# Altium PCB CANLINK_revA.PcbDoc (part 2 of 2)
Units mm, origin at the board's own origin, x right, y up, seen from the top; angles counter-clockwise.
Board outline 58.5 x 50 mm, 4 copper layers (Top Layer, Mid Layer 1, Mid Layer 2, Bottom Layer), stack 1.586 mm thick; 130 components, 134 nets, 434 pads, 142 vias.
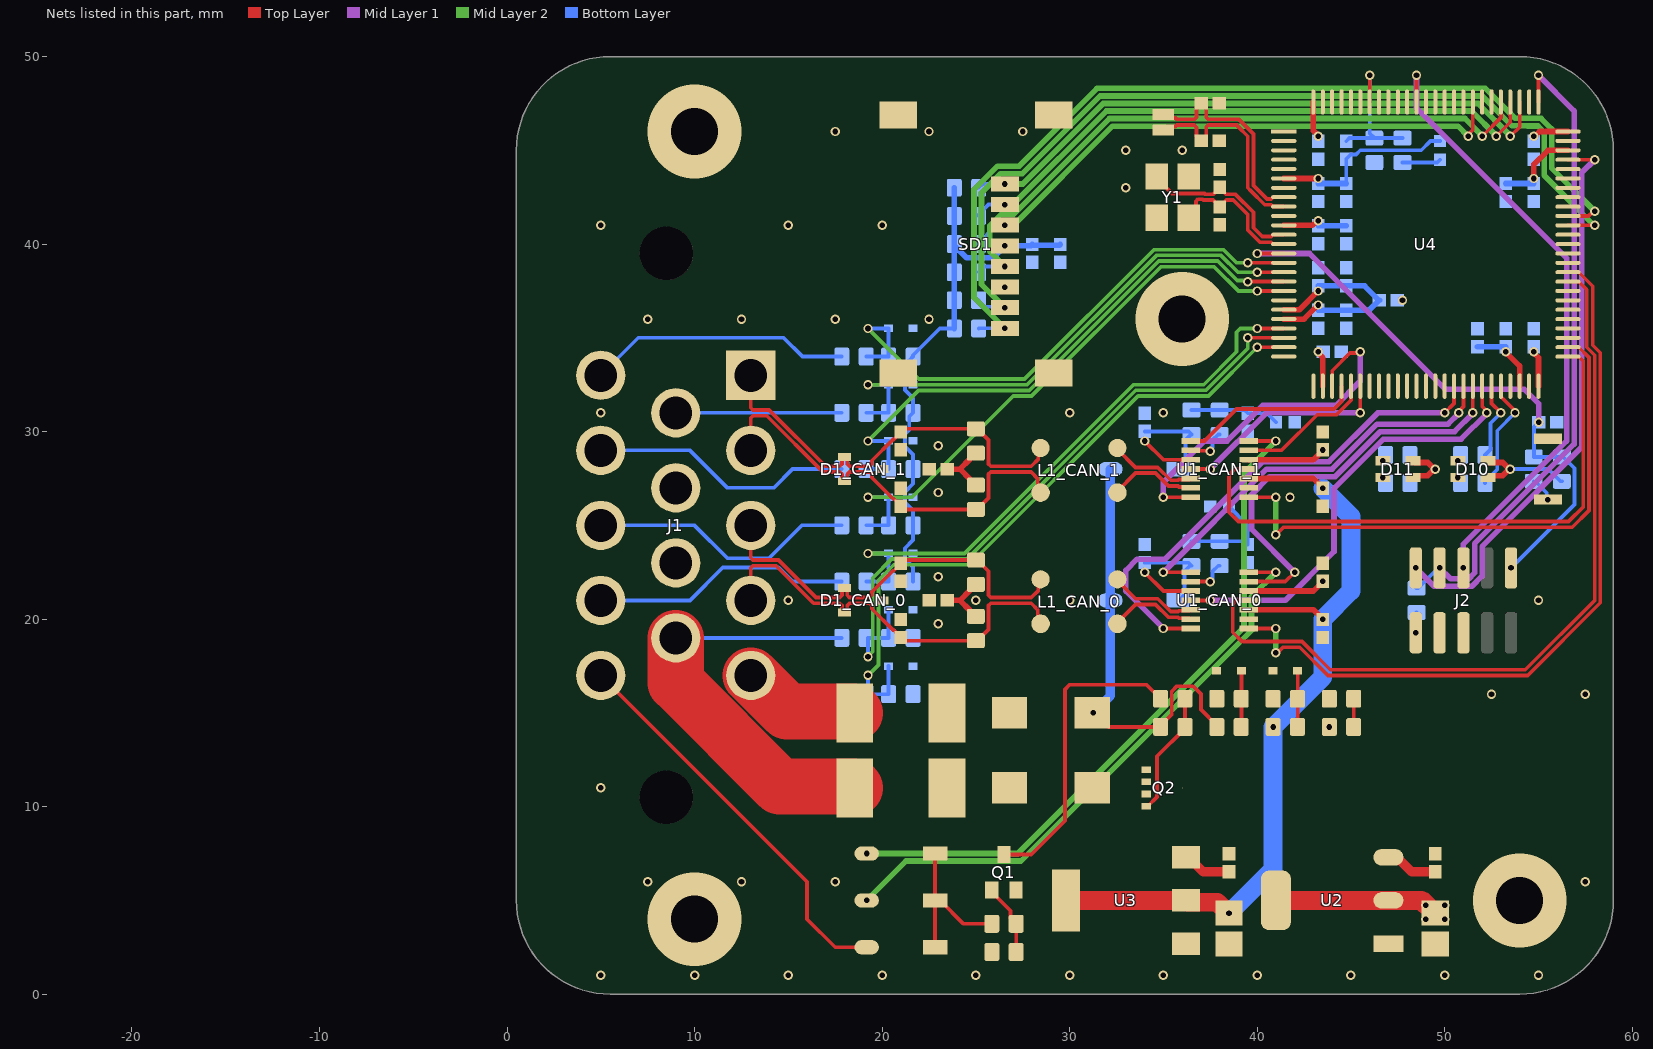
[diagram p4: the nets of this part, all layers, seen from the top]

## Via types
v1: diameter 0.5, hole 0.3, Top Layer to Bottom Layer, 138 vias
v2: diameter 5, hole 2.5, Top Layer to Bottom Layer, 4 vias

## Nets (pads, with @x,y where several pads share a name; then routed paths per layer and width w, separated by ;. In a path a pad name is that pad's centre, name@x,y a point inside that pad or via, vN(x,y) a via of type N, cw(c..) or ccw(c..) an arc to the next point about the centre after c; other vN are vias at no path point)
3V3: C2_CAN_0.1 C2_CAN_1.1 C8.2 C12.1 C13.1 C18.2 C20.1 C21.1 C22.1 C23.1 C24.1 C25.1 C32.1 C33.1 D10.2 D10.3 D11.2 D11.3 FB1.1 J2.1 R6.1 R8.1 R14.1 R20.1 R21.1 R22.1 R23.1 R24.1 R25.1 R26.2 R30.1 R39.1 R41.1 R42.1 R45.2 SD1.4 U1_CAN_0.5 U1_CAN_1.5 U2.2 U2.4 U4.6 U4.11 U4.27 U4.50 U4.75 U4.100 | length 78.8
  Top Layer w0.3: U1_CAN_0.5@39.543,21.5 43,21.5 43.5,22 v1(43.5,22.021) ; U1_CAN_1.5@39.543,28.5 43,28.5 43.5,29 v1(43.5,29.021) ; U4.11@41.425,41 42.946,41 43.196,41.25 v1(43.25,41.25) ; U4.6@41.425,43.5 v1(43.25,43.5) ; U4.100@43,47.575 43,46.046 43.25,45.796 v1(43.25,45.742) ; v1(43.25,34.25) 43.25,34.196 43.5,33.946 U4.27@43.5,32.425 ; D11.2@48.3,27.55 48.4,27.65 49.096,27.65 v1@49.446,28 ; D11.3@48.3,28.45 48.4,28.35 49.096,28.35 v1@49.446,28 ; v1(49.5,28) v1@49.446,28 ; D10.2@52.3,27.55 52.4,27.65 53.096,27.65 v1@53.446,28 ; D10.3@52.3,28.45 52.4,28.35 53.096,28.35 v1@53.446,28 ; v1(53.5,28) v1@53.446,28 ; v1(54.75,34.25) 54.75,34.196 55,33.946 U4.50@55,32.425 ; v1(54.75,45.748) 54.804,45.748 55.056,46 U4.75@56.575,46
  Top Layer w1: U2.4@41,5 48.75,5 v1(49,4.75) 49.025,4.75 49.275,4.5 49.325,4.5 C8.2@49.5,4.325 C8.2@48.885,4.94
  Bottom Layer w0.2: R42.1@21.65,22 21.65,22.785 21.218,23.217 21.218,23.784 21.65,24.215 R41.1@21.65,25 21.65,25.785 21.218,26.217 21.218,26.784 21.65,27.215 R39.1@21.65,28 21.65,28.785 21.218,29.217 21.218,29.855 21.45,30.087 21.45,30.8 R8.1@21.65,31 21.65,31.785 21.218,32.216 21.218,32.855 21.45,33.087 21.45,33.8 R6.1@21.65,34 21.65,34.075 23.075,35.5 R23.1@23.85,35.5 ; C32.1@44.75,43.229 44.75,44.543 44.986,44.779 45.279,44.779 45.5,45 48.75,45 49.242,45.492 49.742,45.492 R45.2@49.75,45.5 ; v1(48.46,19.27) 48.46,20.31 R26.2@48.5,20.35 ; v1(53.5,28) 55.525,28 56.175,27.35 R30.1@56.25,27.35
  Bottom Layer w0.3: R23.1@23.85,35.5 R22.1@23.85,37 R21.1@23.85,38.5 R20.1@23.85,39.925 ; R24.1@23.85,43 R25.1@23.85,41.5 R20.1@23.85,39.925 ; C13.1@28,39.942 29.463,39.942 C12.1@29.5,39.979 ; C13.1@28,39.979 27.926,39.905 v1(26.55,39.905) 25.918,39.273 24.502,39.273 R20.1@23.85,39.925 ; C21.1@43.25,40.979 C20.1@44.75,40.979 ; C33.1@43.25,43.229 C32.1@44.75,43.229
  other v1: 49,4 50,4 50,4.75 43.85,14.25 47.75,37
5V: C1_CAN_0.1 C1_CAN_1.1 C10.2 R16.1 U1_CAN_0.3 U1_CAN_1.3 U3.2 U3.4 | length 43.3
  Top Layer w0.3: U1_CAN_0.3@39.543,20.5 43,20.5 v1(43.5,20) ; U1_CAN_1.3@39.543,27.5 43,27.5 43.5,27 v1(43.5,26.979)
  Top Layer w1: U3.4@29.8,5 U3.2@36.2,5 36.3,4.9 37.875,4.9 38.45,4.325 v1(38.5,4.325)
  Bottom Layer w1: v1(38.5,4.325) 40.85,6.675 v1(40.85,14.25) 43.5,16.9 v1(43.5,20) 45,21.5 45,25.479 v1(43.5,26.979)
AUX_ON: D7.2 J1.14 | length 21.4
  Top Layer w0.2: J1.14@5,17 16,6 16,4 17.5,2.5 D7.2@19.175,2.5
BOOT: C18.1 R27.1 R29.2 U4.94 | length 7.9
  Top Layer w0.2: U4.94@46,47.575 v1(46,49)
  Bottom Layer w0.2: C18.1@44.75,45.479 44.921,45.65 R29.2@46.25,45.65 ; v1(46,49) 46,45.9 R29.2@46.25,45.65 ; R27.1@47.75,45.65 R29.2@46.25,45.65
CAN0_N: C4_CAN_0.1 D1_CAN_0.1 J1.3 L1_CAN_0.4 R3_CAN_0.1 | length 21.9
  Top Layer w0.2: J1.3@13,25 13,23.268 13.117,23.151 14.474,23.151 16.474,21.151 17.739,21.151 17.856,21.268 17.856,21.54 17.966,21.65 D1_CAN_0.1@18,21.65 ; D1_CAN_0.1@18.034,21.65 18.144,21.54 18.144,21.268 18.261,21.151 19.331,21.151 19.448,21.268 19.448,21.449 20.58,22.581 20.624,22.581 C4_CAN_0.1@21,22.957 ; C4_CAN_0.1@21,22.979 21.171,23.15 R3_CAN_0.1@25,23.15 25.075,23.15 25.677,22.548 25.677,21.268 25.794,21.151 27.951,21.151 28.332,21.532 28.332,22.007 L1_CAN_0.4@28.45,22.125
CAN0_P: C7_CAN_0.1 D1_CAN_0.2 J1.4 L1_CAN_0.1 R5_CAN_0.2 | length 22.1
  Top Layer w0.2: J1.4@13,21 13,22.732 13.117,22.849 14.349,22.849 16.349,20.849 17.739,20.849 17.856,20.732 17.856,20.46 17.966,20.35 D1_CAN_0.2@18,20.35 ; D1_CAN_0.2@18.034,20.35 18.144,20.46 18.144,20.732 18.261,20.849 19.331,20.849 19.448,20.732 19.448,20.551 20.58,19.419 20.624,19.419 21.193,18.85 R5_CAN_0.2@25,18.85 25.075,18.85 25.677,19.452 25.677,20.732 25.794,20.849 27.951,20.849 28.294,20.506 28.294,20.262 28.299,20.257 28.299,19.901 L1_CAN_0.1@28.45,19.75
CAN1_N: C4_CAN_1.1 D1_CAN_1.1 J1.1 L1_CAN_1.4 R3_CAN_1.1 | length 22.4
  Top Layer w0.2: J1.1@13,33 13,31.268 13.117,31.151 13.974,31.151 16.974,28.151 17.739,28.151 17.856,28.268 17.856,28.54 17.966,28.65 D1_CAN_1.1@18,28.65 ; D1_CAN_1.1@18.034,28.65 18.144,28.54 18.144,28.268 18.261,28.151 19.331,28.151 19.448,28.268 19.448,28.449 20.58,29.581 20.624,29.581 C4_CAN_1.1@21,29.957 ; C4_CAN_1.1@21,29.979 21.171,30.15 R3_CAN_1.1@25,30.15 25.075,30.15 25.677,29.548 25.677,28.268 25.794,28.151 27.951,28.151 28.332,28.532 28.332,29.007 L1_CAN_1.4@28.45,29.125
CAN1_P: C7_CAN_1.1 D1_CAN_1.2 J1.2 L1_CAN_1.1 R5_CAN_1.2 | length 22.5
  Top Layer w0.2: J1.2@13,29 13,30.732 13.117,30.849 13.849,30.849 16.849,27.849 17.739,27.849 17.856,27.732 17.856,27.46 17.966,27.35 D1_CAN_1.2@18,27.35 ; D1_CAN_1.2@18.034,27.35 18.144,27.46 18.144,27.732 18.261,27.849 19.331,27.849 19.448,27.732 19.448,27.551 20.58,26.419 20.624,26.419 21.193,25.85 R5_CAN_1.2@25,25.85 25.075,25.85 25.677,26.452 25.677,27.732 25.794,27.849 27.951,27.849 28.294,27.506 28.294,27.262 28.299,27.257 28.299,26.901 L1_CAN_1.1@28.45,26.75
CAN_PWR: D2_CAN_0.2 D2_CAN_1.2 D3.1 D4.1 Q2.1 Q2.2 Q2.3 R13.2 R18.1 | length 23.3
  Top Layer w0.2: D3.1@31.311,15 32.061,14.25 R13.2@34.85,14.25 34.85,14.325 35.452,14.927 35.452,16.153 35.725,16.427 36.575,16.427 37,16.002 37,15.175 37.85,14.325 R18.1@37.85,14.25
  Bottom Layer w0.5: v1(31.261,15) 32.175,15.914 D2_CAN_0.2@32.175,21 D2_CAN_1.2@32.175,28
EXT_IN_A: J1.10 R7.2 | length 14.1
  Bottom Layer w0.2: J1.10@5,33 7,35 14.75,35 15.75,34 R7.2@17.85,34
EXT_IN_B: J1.6 R9.2 | length 8.9
  Bottom Layer w0.2: J1.6@9,31 R9.2@17.85,31
EXT_IN_C: J1.11 R40.2 | length 14.1
  Bottom Layer w0.2: J1.11@5,29 9.75,29 11.75,27 14.218,27 15.218,28 R40.2@17.85,28
EXT_IN_D: J1.12 R43.2 | length 14.3
  Bottom Layer w0.2: J1.12@5,25 10,25 11.75,23.25 13.968,23.25 15.718,25 R43.2@17.85,25
EXT_IN_E: J1.13 R44.2 | length 13.9
  Bottom Layer w0.2: J1.13@5,21 9.75,21 11.5,22.75 14.468,22.75 15.218,22 R44.2@17.85,22
G_LED: R31.1 U4.46 | length 6.1
  Top Layer w0.2: U4.46@53,32.425 53,31.853 53.693,31.161 53.693,31.057 v1(53.75,31)
  Bottom Layer w0.2: R31.1@52.15,27.25 52.15,27.325 52.8,27.975 52.8,30.05 v1(53.75,31)
GND: C1_CAN_0.2 C1_CAN_1.2 C2_CAN_0.2 C2_CAN_1.2 C3_CAN_0.2 C3_CAN_1.2 C4_CAN_0.2 C4_CAN_1.2 C5_CAN_0.2 C5_CAN_1.2 C6_CAN_0.2 C6_CAN_1.2 C7_CAN_0.2 C7_CAN_1.2 C8.1 C9.2 C10.1 C11.2 C12.2 C13.2 C14.2 C15.2 C16.2 C17.2 C19.2 C20.2 C21.2 C22.2 C23.2 C24.2 C25.2 C26.2 C27.2 C28.2 C29.2 C30.2 C31.2 C32.2 C33.2 C34.2 C35.2 D1_CAN_0.3 D1_CAN_1.3 D5.2 D6.2 D12.2 D13.2 D14.2 D15.2 D16.2 D17.2 D18.2 J1.7 J1.8 J2.3 J2.5 Q1.2 R4_CAN_0.1 R4_CAN_1.1 R11.2 R15.2 R17.2 R19.2 R29.1 R33.1 R36.2 R38.2 SD1.6 SD1.9 SD1.10 SD1.11 SD1.12 SW2.2 U1_CAN_0.2 U1_CAN_1.2 U2.1 U3.1 U4.10 U4.19 U4.26 U4.49 U4.74 U4.99 Y1.2 Y1.4
  other v1: 5,1 10,1 15,1 20,1 25,1 30,1 35,1 40,1 45,1 50,1 55,1 7.5,6 12.5,6 17.5,6 57.5,6 5,11 52.5,16 57.5,16 23,19.75 15,21 25,21 30,21 55,21 23,22.25 41.75,26.5 23,26.75 23,29.25 5,31 30,31 35,31 7.5,36 12.5,36 17.5,36 22.5,36 26.55,37.705 5,41 15,41 20,41 33,43 33,45 36,45 17.5,46 22.5,46 27.5,46
  other v2: 10,4 54,5 36,36 10,46
NetC3_CAN_0_1: C3_CAN_0.1 D2_CAN_0.1 R1_CAN_0.1 U1_CAN_0.10 | length 7.6
  Top Layer w0.2: v1(34,22.5) 35,21.5 U1_CAN_0.10@36.457,21.5
  Bottom Layer w0.2: C3_CAN_0.1@34,23.021 34.021,23 36.35,23 R1_CAN_0.1@36.5,22.85 36.425,22.85 36.125,22.55 36.125,21.281 35.844,21 D2_CAN_0.1@35.825,21
NetC3_CAN_1_1: C3_CAN_1.1 D2_CAN_1.1 R1_CAN_1.1 U1_CAN_1.10 | length 7.4
  Top Layer w0.2: v1(34,29.5) 35,28.5 U1_CAN_1.10@36.457,28.5
  Bottom Layer w0.2: C3_CAN_1.1@34,30.021 34.021,30 36.35,30 R1_CAN_1.1@36.5,29.85 36.475,29.85 36.175,29.55 D2_CAN_1.1@36.175,28.077
NetC5_CAN_0_1: C5_CAN_0.1 R1_CAN_0.2 R2_CAN_0.2 R4_CAN_0.2 | length 5.5
  Bottom Layer w0.2: R1_CAN_0.2@36.5,24.15 R2_CAN_0.2@38,24.15 39.329,24.15 C5_CAN_0.1@39.5,23.979 ; R4_CAN_0.2@38.5,26 39.5,25 C5_CAN_0.1@39.5,23.979 ; C5_CAN_0.1@39.5,24 C5_CAN_0.1@39.5,23.979
NetC5_CAN_1_1: C5_CAN_1.1 R1_CAN_1.2 R2_CAN_1.2 R4_CAN_1.2 | length 4.8
  Bottom Layer w0.2: R1_CAN_1.2@36.5,31.15 R2_CAN_1.2@38,31.15 39.329,31.15 C5_CAN_1.1@39.5,30.979 40.521,30.979 R4_CAN_1.2@41,30.5
NetC6_CAN_0_1: C6_CAN_0.1 R3_CAN_0.2 R5_CAN_0.1 | length 3.2
  Top Layer w0.3: C6_CAN_0.1@23.479,21 24.15,21 ; R5_CAN_0.1@25,20.15 24.925,20.15 24.675,20.4 24.675,20.475 24.15,21 ; R3_CAN_0.2@25,21.85 24.925,21.85 24.675,21.6 24.675,21.525 24.15,21
NetC6_CAN_1_1: C6_CAN_1.1 R3_CAN_1.2 R5_CAN_1.1 | length 3.2
  Top Layer w0.3: C6_CAN_1.1@23.479,28 24.15,28 ; R5_CAN_1.1@25,27.15 24.925,27.15 24.675,27.4 24.675,27.475 24.15,28 ; R3_CAN_1.2@25,28.85 24.925,28.85 24.675,28.6 24.675,28.525 24.15,28
NetC9_1: C9.1 C11.1 Q2.5-6-7-8 U2.3 U3.3 | length 5.4
  Top Layer w0.5: U3.3@36.2,7.3 36.35,7.3 37.129,6.521 C11.1@38.5,6.521 ; U2.3@47,7.3 47.465,7.3 48.244,6.521 C9.1@49.5,6.521
NetC28_1: C28.1 C29.1 U4.48 | length 3.6
  Top Layer w0.3: v1(53.25,34.25) 54,33.5 U4.48@54,32.425
  Bottom Layer w0.3: C28.1@51.75,34.521 C29.1@53.25,34.521
NetC30_1: C30.1 C31.1 U4.73 | length 4.4
  Top Layer w0.3: v1(54.75,43.5) 54.75,44.25 55.5,45 U4.73@56.575,45
  Bottom Layer w0.3: C30.1@53.25,43.229 C31.1@54.75,43.229
NetD3_2: D3.2 F1.2
NetD4_2: D4.2 F2.2
NetD5_1: D5.1 R6.2 R7.1 U4.15 | length 30.2
  Top Layer w0.2: v1(39.5,39) U4.15@41.425,39
  Mid Layer 2 w0.2: v1(19.25,35.5) 21.95,32.8 27.6,32.8 34.5,39.7 38.2,39.7 38.9,39 v1(39.5,39)
  Bottom Layer w0.2: R7.1@19.15,34 R6.2@20.35,34 20.34,34.01 D5.1@20.34,35.5 v1(19.25,35.5)
NetD6_1: D6.1 R8.2 R9.1 U4.16 | length 29.2
  Top Layer w0.2: v1(40,38.5) U4.16@41.425,38.5
  Mid Layer 2 w0.2: v1(19.25,32.5) 19.252,32.498 27.725,32.498 34.625,39.398 38.075,39.398 38.973,38.5 v1(40,38.5)
  Bottom Layer w0.2: R9.1@19.15,31 R8.2@20.35,31 20.34,31.01 D6.1@20.34,32.5 v1(19.25,32.5)
NetD7_1: D7.1 D8.1 D9.1 R10.2 | length 8.5
  Top Layer w0.2: D7.1@22.825,2.5 D8.1@22.825,5 ; D9.1@22.825,7.5 D8.1@22.825,5 ; R10.2@25.85,3.75 24.348,3.75 23.098,5 D8.1@22.825,5
NetD10_1: D10.1 R31.2
  other v1: 50.7,27.55
NetD10_4: D10.4 R32.2
  other v1: 50.7,28.45
NetD11_1: D11.1 R33.2
  other v1: 46.7,27.55
NetD11_4: D11.4 R34.2
  other v1: 46.7,28.45
NetD12_1: D12.1 R35.2 R36.1 U4.24 | length 36.1
  Top Layer w0.2: v1(40,34.5) U4.24@41.425,34.5
  Mid Layer 2 w0.2: v1(19.25,17) 19.802,17.552 19.802,22.075 20.625,22.898 24.651,22.898 33.653,31.9 37.4,31.9 v1(40,34.5)
  Bottom Layer w0.2: R35.2@19.15,16 R35.2@19.25,16 ; v1(19.25,17) R35.2@19.25,16 ; R35.2@19.5,15.75 R35.2@19.25,16 ; D12.1@20.34,17.5 20.34,16.01 R36.1@20.35,16 R35.2@19.25,16
NetD13_1: D13.1 R37.2 R38.1 U4.23 | length 35.5
  Top Layer w0.2: v1(39.5,35) U4.23@41.425,35
  Mid Layer 2 w0.2: v1(19.25,18) 19.25,18.017 19.5,18.267 19.5,22.2 20.5,23.2 24.527,23.2 33.528,32.202 37.275,32.202 39.5,34.427 v1(39.5,35)
  Bottom Layer w0.2: v1(19.25,18) 19.25,19 R38.1@20.35,19 20.34,19.01 D13.1@20.34,20.5
NetD14_1: D14.1 R16.2 R17.1 | length 3
  Top Layer w0.2: R16.2@42.15,14.25 42.16,14.26 D14.1@42.16,17.25
NetD15_1: D15.1 R18.2 R19.1 | length 3
  Top Layer w0.2: R18.2@39.15,14.25 39.16,14.26 D15.1@39.16,17.25
NetD16_1: D16.1 R39.2 R40.1 U4.17 | length 30.4
  Top Layer w0.2: v1(39.5,38) U4.17@41.425,38
  Mid Layer 2 w0.2: v1(19.25,29.5) 21.947,32.197 27.85,32.197 34.75,39.097 37.903,39.097 38.943,38.057 39.443,38.057 v1(39.5,38)
  Bottom Layer w0.2: R40.1@19.15,28 R39.2@20.35,28 20.34,28.01 D16.1@20.34,29.5 v1(19.25,29.5)
NetD17_1: D17.1 R41.2 R43.1 U4.18 | length 31.3
  Top Layer w0.2: 40.25,37.5 U4.18@41.425,37.5
  Mid Layer 2 w0.2: v1(19.25,26.5) 21.6,26.5 26.995,31.895 27.975,31.895 34.875,38.795 37.705,38.795 39,37.5 v1(40,37.5)
  Bottom Layer w0.2: R43.1@19.15,25 R41.2@20.35,25 20.34,25.01 D17.1@20.34,26.5 v1(19.25,26.5)
NetD18_1: D18.1 R42.2 R44.1 U4.22 | length 31.6
  Top Layer w0.2: v1(40,35.5) U4.22@41.425,35.5
  Mid Layer 2 w0.2: v1(19.25,23.5) 19.252,23.502 24.402,23.502 33.403,32.503 37.15,32.503 38.9,34.253 38.9,35.3 39.1,35.5 v1(40,35.5)
  Bottom Layer w0.2: R44.1@19.15,22 R42.2@20.35,22 20.34,22.01 D18.1@20.34,23.5 v1(19.25,23.5)
NetQ1_1: Q1.1 R10.1 R11.1 | length 3.8
  Top Layer w0.2: Q1.1@25.85,5.55 25.85,5.45 26.85,4.45 26.85,4.05 R10.1@27.15,3.75 R11.1@27.15,2.25
NetQ1_3: Q1.3 R12.2 | length 16.6
  Top Layer w0.2: Q1.3@26.5,7.45 27.95,7.45 29.75,9.25 29.75,16.25 30,16.5 34.1,16.5 34.475,16.125 34.55,16.125 34.85,15.825 R12.2@34.85,15.75
NetQ2_4: Q2.4 R12.1 R13.1 | length 6.6
  Top Layer w0.2: Q2.4@34.09,10.025 34.165,10.025 34.658,10.518 34.658,12.683 36.15,14.175 R13.1@36.15,14.25 R12.1@36.15,15.75
NetR2_CAN_0_1: R2_CAN_0.1 U1_CAN_0.9 | length 2.1
  Top Layer w0.2: U1_CAN_0.9@36.457,22 v1(37.5,22)
  Bottom Layer w0.2: v1(37.5,22) 37.625,22.125 37.625,22.55 37.925,22.85 R2_CAN_0.1@38,22.85
NetR2_CAN_1_1: R2_CAN_1.1 U1_CAN_1.9 | length 2.2
  Top Layer w0.2: U1_CAN_1.9@36.457,29 36.482,28.975 37.475,28.975 v1(37.5,28.95)
  Bottom Layer w0.2: v1(37.5,28.95) 37.5,29.031 37.625,29.156 37.625,29.55 37.925,29.85 R2_CAN_1.1@38,29.85
NetR14_2: R14.2 R15.1 | length 1.5
  Top Layer w0.2: R14.2@45.15,14.25 R15.1@45.15,15.75
NetR27_2: R27.2 R45.1 | length 2.1
  Bottom Layer w0.2: R27.2@47.75,44.35 49.6,44.35 R45.1@49.75,44.5
NetR28_2: R28.2 SW2.1 | length 1.3
  Bottom Layer w0.2: R28.2@54.75,27.35 54.825,27.35 55.443,26.732 55.443,26.432 v1(55.5,26.375)
NetU1_CAN_0_1: U1_CAN_0.1 U4.60 | length 41.1
  Top Layer w0.2: U1_CAN_0.1@39.543,19.5 v1(41,19.5) ; v1(40.996,18.204) 41.078,18.204 41.374,18.5 42.273,18.5 43.775,16.998 54.425,16.998 58.3,20.873 58.3,34.2 57.9,34.6 57.9,37.747 57.147,38.5 U4.60@56.575,38.5
  Mid Layer 2 w0.3: v1(40.996,18.204) 40.998,18.205 v1(41,19.5) v1(41,19.5)
NetU1_CAN_0_4: U1_CAN_0.4 U4.59 | length 42
  Top Layer w0.2: U1_CAN_0.4@39.543,21 39.532,20.989 38.889,20.989 38.7,20.8 38.7,19.3 39.198,18.802 42.398,18.802 43.9,17.3 54.3,17.3 57.998,20.998 57.998,34.075 57.576,34.497 57.576,37.571 57.151,37.996 56.58,37.996 U4.59@56.575,38
NetU1_CAN_0_6: U1_CAN_0.6 U4.43 | length 22.8
  Top Layer w0.2: U1_CAN_0.6@39.543,22 41.5,22 v1(42,22.5) ; v1(51.5,31) U4.43@51.5,32.425
  Mid Layer 1 w0.3: v1(42,22.5) 39.7,24.8 39.7,26.632 40.666,27.598 44.166,27.598 46.566,29.998 49.998,29.998 50,30 50.528,30 51.5,30.972 v1(51.5,31)
NetU1_CAN_0_8: U1_CAN_0.8 U4.42 | length 22.3
  Top Layer w0.2: v1(35,22.5) U1_CAN_0.8@36.457,22.5 ; v1(50.75,31) 50.75,31.081 51,31.331 U4.42@51,32.425
  Mid Layer 1 w0.3: v1(35,22.5) 40.5,28 44,28 46.4,30.4 49.832,30.4 49.834,30.402 50.179,30.402 50.75,30.972 v1(50.75,31)
NetU1_CAN_0_11: U1_CAN_0.11 U4.44 | length 23.5
  Top Layer w0.2: U1_CAN_0.11@36.457,21 v1(37.5,21) ; U4.44@52,32.425 52,31.331 52.25,31.081 v1(52.25,31)
  Mid Layer 1 w0.3: v1(37.5,21) 41.5,21 44.1,23.6 44.1,26.964 46.733,29.597 50.875,29.597 52.25,30.972 v1(52.25,31)
NetU1_CAN_0_14: U1_CAN_0.14 U4.41 | length 27.5
  Top Layer w0.2: v1(35,19.5) U1_CAN_0.14@36.457,19.5 ; v1(50,31) 50.5,31.5 U4.41@50.5,32.425
  Mid Layer 1 w0.3: v1(35,19.5) 33,21.5 33,22.6 33.6,23.2 35.1,23.2 40.302,28.402 43.834,28.402 46.432,31 v1(50,31)
NetU1_CAN_1_1: U1_CAN_1.1 U4.52 | length 30.2
  Top Layer w0.2: U1_CAN_1.1@39.543,26.5 v1(41,26.5) ; v1(41,24.5) 41.398,24.898 56.198,24.898 56.2,24.9 56.8,24.9 57.697,25.797 57.697,33.95 57.147,34.5 U4.52@56.575,34.5
  Mid Layer 2 w0.3: v1(41,24.5) v1(41,26.5)
NetU1_CAN_1_4: U1_CAN_1.4 U4.51 | length 31.3
  Top Layer w0.2: U1_CAN_1.4@39.543,28 38.8,28 38.5,27.7 38.5,25.7 39,25.2 56.073,25.2 56.075,25.202 56.602,25.202 57.395,25.995 57.395,33.752 57.151,33.996 56.58,33.996 U4.51@56.575,34
NetU1_CAN_1_6: U1_CAN_1.6 U4.30 | length 7.3
  Top Layer w0.2: U1_CAN_1.6@39.543,29 41.3,29 43.2,30.9 44.227,30.9 44.802,31.475 45,31.673 U4.30@45,32.425
NetU1_CAN_1_8: U1_CAN_1.8 U4.29 | length 9.7
  Top Layer w0.2: U1_CAN_1.8@36.457,29.5 37.2,29.5 38.902,31.202 44.102,31.202 44.5,31.6 U4.29@44.5,32.425
NetU1_CAN_1_11: U1_CAN_1.11 U4.31 | length 11.7
  Top Layer w0.2: U1_CAN_1.11@36.457,28 v1(37.5,28) ; v1(45.5,31) U4.31@45.5,32.425
  Mid Layer 1 w0.3: v1(37.5,28) 40.498,30.998 45.498,30.998 v1(45.5,31)
NetU1_CAN_1_14: U1_CAN_1.14 U4.28 | length 19.3
  Top Layer w0.2: v1(35,26.5) U1_CAN_1.14@36.457,26.5 ; U4.28@44,32.425 44,33.25 44.943,34.193 45.443,34.193 v1(45.5,34.25)
  Mid Layer 1 w0.3: v1(35,26.5) 35,27.3 37.2,29.5 38.4,29.5 40.3,31.4 44.2,31.4 45.5,32.7 v1(45.5,34.25)
NetU4_1: U4.1
NetU4_2: U4.2
NetU4_3: U4.3
NetU4_4: U4.4
NetU4_5: U4.5
NetU4_7: U4.7
NetU4_25: U4.25
NetU4_32: U4.32
NetU4_33: U4.33
NetU4_34: U4.34
NetU4_35: U4.35
NetU4_36: U4.36
NetU4_37: U4.37
NetU4_38: U4.38
NetU4_39: U4.39
NetU4_40: U4.40
NetU4_47: U4.47
NetU4_53: U4.53
NetU4_54: U4.54
NetU4_55: U4.55
NetU4_56: U4.56
NetU4_57: U4.57
NetU4_58: U4.58
NetU4_61: U4.61
NetU4_62: U4.62
NetU4_63: U4.63
NetU4_64: U4.64
NetU4_67: U4.67
NetU4_68: U4.68
NetU4_69: U4.69
NetU4_70: U4.70
NetU4_71: U4.71
NetU4_77: U4.77
NetU4_81: U4.81
NetU4_82: U4.82
NetU4_84: U4.84
NetU4_85: U4.85
NetU4_86: U4.86
NetU4_87: U4.87
NetU4_88: U4.88
NetU4_90: U4.90
NetU4_91: U4.91
NetU4_92: U4.92
NetU4_93: U4.93
NetU4_95: U4.95
NetU4_96: U4.96
NetU4_97: U4.97
NetU4_98: U4.98
nPWR_FLT_LED: R34.1
PRE_CAN_CAN_0_N: L1_CAN_0.3 U1_CAN_0.12 | length 4.7
  Top Layer w0.2: L1_CAN_0.3@32.55,22.125 32.55,22.055 33.517,21.088 33.925,21.088 34.705,21.088 35.392,20.401 35.792,20.401 35.839,20.447 36.405,20.447 U1_CAN_0.12@36.457,20.5
PRE_CAN_CAN_0_P: L1_CAN_0.2 U1_CAN_0.13 | length 4.7
  Top Layer w0.2: L1_CAN_0.2@32.55,19.75 32.55,19.82 33.517,20.787 33.8,20.787 34.58,20.787 35.267,20.099 35.792,20.099 35.839,20.052 36.405,20.052 U1_CAN_0.13@36.457,20
PRE_CAN_CAN_1_N: L1_CAN_1.3 U1_CAN_1.12 | length 4.7
  Top Layer w0.2: L1_CAN_1.3@32.55,29.125 32.55,29.055 33.517,28.088 33.925,28.088 34.705,28.088 35.392,27.401 35.792,27.401 35.839,27.447 36.405,27.447 U1_CAN_1.12@36.457,27.5
PRE_CAN_CAN_1_P: L1_CAN_1.2 U1_CAN_1.13 | length 4.7
  Top Layer w0.2: L1_CAN_1.2@32.55,26.75 32.55,26.82 33.517,27.787 33.8,27.787 34.58,27.787 35.267,27.099 35.792,27.099 35.839,27.052 36.405,27.052 U1_CAN_1.13@36.457,27
PWR_A: F1.1 J1.5 R35.1 | length 11.6
  Top Layer w3: J1.5@13,17 14.925,15.075 18.47,15.075 F1.1@18.545,15
  Bottom Layer w0.2: J1.5@13,17 13.28,17 14.28,16 R35.1@17.85,16
PWR_B: F2.1 J1.9 R37.1 | length 23.1
  Top Layer w3: J1.9@9,19 9,16.614 14.539,11.075 18.47,11.075 F2.1@18.545,11
  Bottom Layer w0.2: J1.9@9,19 R37.1@17.85,19
R_LED: R32.1 U4.45 | length 4.2
  Top Layer w0.2: U4.45@52.5,32.425 52.5,31.5 v1(53,31)
  Bottom Layer w0.2: R32.1@52.15,28.75 52.443,29.043 52.443,30.443 v1(53,31)
RESETN: C19.1 J2.10 R28.1 R30.2 U4.14 | length 31.9
  Top Layer w0.2: v1(40,39.5) U4.14@41.425,39.5
  Mid Layer 1 w0.3: v1(40,39.5) 42.8,39.5 50.05,32.25 54.25,32.25 55.021,31.479 v1(55.021,30.5)
  Bottom Layer w0.2: v1(53.54,22.73) 56.927,26.117 56.927,28.048 56.325,28.65 R30.2@56.25,28.65 R28.1@54.75,28.65 54.764,28.664 54.764,30.264 55,30.5 v1(55.021,30.5)
SD_CLK: R21.2 SD1.5 U4.80 | length 35.3
  Top Layer w0.2: v1(52,45.75) 53,46.75 U4.80@53,47.575
  Mid Layer 2 w0.3: v1(26.55,38.805) 25.75,39.605 25.75,40.983 26.322,41.555 26.987,41.555 32.126,46.694 51.084,46.694 52,45.778 v1(52,45.75)
  Bottom Layer w0.2: R21.2@25.15,38.5 25.15,38.505 25.45,38.805 v1(26.55,38.805)
SD_CMD: R20.2 SD1.3 U4.83 | length 30.9
  Top Layer w0.2: v1(51.25,45.75) 51.25,45.831 51.5,46.081 U4.83@51.5,47.575
  Mid Layer 2 w0.3: v1(26.55,41.005) 27.005,41.005 32.292,46.292 50.708,46.292 v1(51.25,45.75)
  Bottom Layer w0.2: R20.2@25.15,40 25.15,40.075 26.023,40.948 26.493,40.948 v1(26.55,41.005)
SD_DAT0: R22.2 SD1.7 U4.65 | length 48.7
  Top Layer w0.2: U4.65@56.575,41 v1(58,41)
  Mid Layer 2 w0.3: v1(26.55,36.605) 25.302,37.853 25.302,42.734 26.322,43.755 27.483,43.755 31.627,47.898 52.002,47.898 53.6,46.3 54.432,46.3 54.434,46.298 54.979,46.298 55.3,45.978 55.3,43.672 57.972,41 v1(58,41)
  Bottom Layer w0.2: R22.2@25.15,37 25.15,36.962 25.45,36.662 26.493,36.662 v1(26.55,36.605)
SD_DAT1: R23.2 SD1.8 U4.66 | length 50.3
  Top Layer w0.2: U4.66@56.575,41.5 57.669,41.5 57.919,41.75 v1(58,41.75)
  Mid Layer 2 w0.3: v1(26.55,35.505) 24.9,37.155 24.9,42.901 26.156,44.157 27.317,44.157 31.46,48.3 52.168,48.3 53.766,46.702 54.598,46.702 54.6,46.7 55.146,46.7 55.702,46.144 55.702,44.048 v1(58,41.75)
  Bottom Layer w0.2: R23.2@25.15,35.5 25.155,35.505 v1(26.55,35.505)
SD_DAT2: R24.2 SD1.1 U4.78 | length 33
  Top Layer w0.2: v1(53.5,45.75) 54,46.25 U4.78@54,47.575
  Mid Layer 2 w0.3: v1(26.55,43.205) 27.501,43.205 31.793,47.497 51.781,47.497 53.5,45.778 v1(53.5,45.75)
  Bottom Layer w0.2: R24.2@25.15,43 25.355,43.205 v1(26.55,43.205)
SD_DAT3: R25.2 SD1.2 U4.79 | length 32.7
  Top Layer w0.2: v1(52.75,45.75) 53.5,46.5 U4.79@53.5,47.575
  Mid Layer 2 w0.3: v1(26.55,42.105) 26.969,42.105 31.959,47.095 51.433,47.095 52.75,45.778 v1(52.75,45.75)
  Bottom Layer w0.2: R25.2@25.15,41.5 25.15,41.575 25.68,42.105 v1(26.55,42.105)
SWCLK: J2.4 R26.1 U4.76 | length 34.9
  Top Layer w0.2: U4.76@55,47.575 v1(55,49)
  Mid Layer 1 w0.3: v1(49.73,22.73) 50.308,22.152 51.284,22.152 51.598,22.466 51.598,24.03 56.902,29.334 56.902,47.098 v1(55,49)
  Bottom Layer w0.2: R26.1@48.5,21.65 48.575,21.65 49.655,22.73 v1(49.73,22.73)
SWDIO: J2.2 U4.72 | length 30.3
  Top Layer w0.2: U4.72@56.575,44.5 v1(58,44.5)
  Mid Layer 1 w0.3: v1(48.46,22.73) 49.44,21.75 51.45,21.75 52,22.3 52,23.864 57.303,29.167 57.303,43.803 v1(58,44.5)
SWO: J2.6 U4.89 | length 33.3
  Top Layer w0.2: U4.89@48.5,47.575 v1(48.5,49)
  Mid Layer 1 w0.3: v1(48.5,49) 48.5,47.25 56.5,39.25 56.5,29.5 51,24 v1(51,22.73)
TCAN1146_EN_0: D8.2 U1_CAN_0.7 | length 31.6
  Top Layer w0.2: U1_CAN_0.7@39.543,22.5 v1(41,22.5)
  Mid Layer 2 w0.3: v1(19.175,5) 21.275,7.1 27.4,7.1 39.7,19.4 39.7,21.2 v1(41,22.5)
TCAN1146_EN_1: D9.2 U1_CAN_1.7 | length 37.2
  Top Layer w0.2: U1_CAN_1.7@39.543,29.5 v1(41,29.5)
  Mid Layer 2 w0.3: v1(19.175,7.5) 19.177,7.502 27.234,7.502 39.298,19.566 39.298,27.799 v1(41,29.5)
VDDA: C26.1 C27.1 C34.1 C35.1 FB1.2 U4.20 U4.21 | length 11.4
  Top Layer w0.3: U4.21@41.425,36 42.5,36 v1(43.25,36.75) ; U4.20@41.425,36.5 42.25,36.5 v1(43.25,37.5)
  Bottom Layer w0.3: C27.1@43.25,36.479 C26.1@44.75,36.479 45.979,36.479 FB1.2@46.5,37 ; C35.1@43.25,37.771 C34.1@44.75,37.771 45.729,37.771 FB1.2@46.5,37 ; FB1.2@46.521,37 FB1.2@46.5,37
X32_N: C17.1 U4.9 Y2.2 | length 11.2
  Top Layer w0.2: Y2.2@35,46.087 35.188,46.275 35.644,46.275 35.718,46.349 36.267,46.349 36.647,46.349 36.764,46.232 36.764,45.736 37,45.5 C17.1@37.021,45.5 ; C17.1@37.043,45.5 37.279,45.736 37.279,46.232 37.396,46.349 38.901,46.349 39,46.25 39.5,45.75 39.5,43 39.677,42.823 40.401,42.099 40.751,42.099 40.85,42 U4.9@41.425,42
X32_P: C16.1 U4.8 Y2.1 | length 11.2
  Top Layer w0.2: Y2.1@35,46.913 35.188,46.725 35.644,46.725 35.718,46.651 36.392,46.651 36.647,46.651 36.764,46.768 36.764,47.264 37,47.5 C16.1@37.021,47.5 ; C16.1@37.043,47.5 37.279,47.264 37.279,46.768 37.396,46.651 39.026,46.651 39.802,45.875 39.802,43.125 40.526,42.401 40.751,42.401 40.85,42.5 U4.8@41.425,42.5
X_N: C14.1 U4.13 Y1.1 | length 7.6
  Top Layer w0.2: Y1.1@36.35,41.4 36.736,41.786 36.736,42.28 36.853,42.397 37.077,42.397 37.125,42.349 37.651,42.349 C14.1@38,42 ; C14.1@38,41.979 C14.1@38,42 ; U4.13@41.425,40 40.85,40 40.751,40.099 40.151,40.099 39.974,40.276 39.677,40.573 39.5,40.75 39.5,41.573 38.724,42.349 38.349,42.349 C14.1@38,42
X_P: C15.1 U4.12 Y1.3 | length 9
  Top Layer w0.2: Y1.3@34.65,43.6 34.65,43.5 35.457,42.693 36.723,42.693 36.728,42.698 37.202,42.698 37.25,42.651 37.651,42.651 C15.1@38,43 ; C15.1@38,43.021 C15.1@38,43 ; U4.12@41.425,40.5 40.85,40.5 40.751,40.401 40.276,40.401 39.802,40.875 39.802,41.698 38.849,42.651 38.349,42.651 C15.1@38,43
pads on no net: J1. J2.7 J2.8 J2.9

## Polygon pours and split planes (outlines as drawn)
GND on Top Layer "GND_L01_P006" (solid, remove dead copper, pour order 6): 0.5,5 0.5,45 cw(c5.5,45) 5.5,50 54,50 cw(c54,45) 59,45 59,5 cw(c54,5) 54,0 5.5,0 cw(c5.5,5)
NetD4_2 on Top Layer "NETD4_2_L01_P004" (solid, remove dead copper, pour order 4): 22.25,13 22.25,9 28,9 28,13
NetC9_1 on Top Layer "NETC9_1_L01_P003" (solid, remove dead copper, pour order 3): 34.75,13 34.75,6.5 37.5,6.5 37.5,8.5 45.5,8.5 45.5,6.5 48.5,6.5 48.5,13
CAN_PWR on Top Layer "CAN_PWR_L01_P002" (solid, remove dead copper, pour order 2): 34.513,9.759 30.013,9.759 30.013,16.259 34.013,16.259 34.013,13 34.513,13
NetD3_2 on Top Layer "NETD3_2_L01_P001" (solid, remove dead copper, pour order 1): 22.25,17 22.25,13 28,13 28,17
3V3 on Mid Layer 2 "3V3_L03_P005" (solid, remove dead copper, pour order 5): 43,39 26,39 26,42 43,42 43,46 55,46 55,34 51,34 51,30.5 54,30.5 54,25.5 51,25.5 51,3 43,3
GND on Mid Layer 2 "GND_L03_P008" (solid, remove dead copper, pour order 8): 0.5,5 0.5,45 cw(c5.5,45) 5.5,50 54,50 cw(c54,45) 59,45 59,5 cw(c54,5) 54,0 5.5,0 cw(c5.5,5)
GND on Bottom Layer "GND_L04_P007" (solid, remove dead copper, pour order 7): 0.5,5 0.5,45 cw(c5.5,45) 5.5,50 54,50 cw(c54,45) 59,45 59,5 cw(c54,5) 54,0 5.5,0 cw(c5.5,5)
GND on Mid Layer 1 "GND_L02_P009" (solid, remove dead copper, pour order 9): 0.5,5 0.5,45 cw(c5.5,45) 5.5,50 54,50 cw(c54,45) 59,45 59,5 cw(c54,5) 54,0 5.5,0 cw(c5.5,5)

## Silkscreen, mask and mechanical layers (free items; w line width, h text height)
Top Overlay:
  drawing of 12 lines, arcs and shapes, not listed
  text "PWR" at 46.167,29.2 h1
  text "MCU" at 50.167,29.2 h1
Mechanical 1:
  the board outline again, w0.254

## Text inside footprints (layer, text, board x,y; h text height)
J1: Top 3D Body "PCB edge" at -2.549,28.861 h1.27 r270
U1_CAN_0: Top 3D Body "*" at 38.991,20.2 h1.27 r180; Top Overlay "*" at 40.115,19.322 h1.27 r180
U1_CAN_1: Top 3D Body "*" at 38.991,27.2 h1.27 r180; Top Overlay "*" at 40.115,26.322 h1.27 r180